# Altium PCB PCB.PcbDoc
Units mm, origin at the board's own origin, x right, y up, seen from the top; angles counter-clockwise.
Board outline 17.5 x 15 mm, 2 copper layers (Top Layer, Bottom Layer); 1 components, 2 nets, 7 pads, 0 vias.
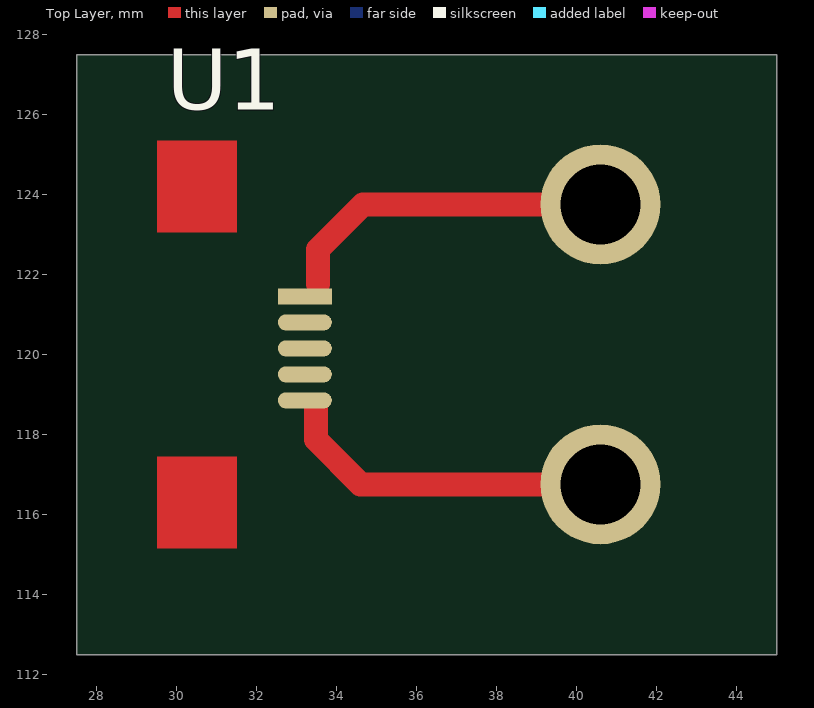
[diagram p0: Top Layer view]
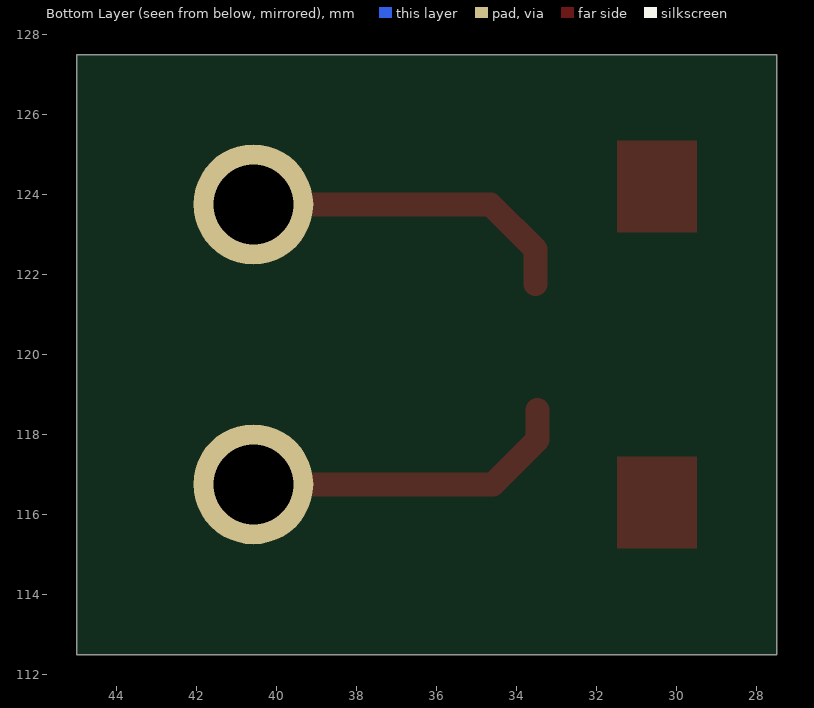
[diagram p1: Bottom Layer view, seen from below]

## Layer stack, top to bottom
Top Layer: signal copper 0.0356
Dielectric: dielectric 0.32, FR-4, Dk 4.8
Bottom Layer: signal copper 0.0356

## Board outline
27.5,127.5 45,127.5 45,112.5 27.5,112.5

## Design rules (kind name [scope] priority, off if disabled: settings)
Clearance Clearance_1 [IsRegion] p1: gap=1
Clearance [Not HasFootprint('LED')] p2: gap=0.6
PolygonConnect [All] p1: connectstyle=Relief reliefconductorwidth=0.254 reliefentries=4 polygonreliefangle="90 Angle"
RoutingVias [All] p1: holewidth=0.711 width=1.27 viastyle="Through Hole" minholewidth=0.711 minwidth=1.27 maxholewidth=0.711 maxwidth=1.27
SilkscreenOverComponentPads [All] p1: minsilkscreentomaskgap=0.254
SolderMaskExpansion SolderMaskExpansion_1 [HasFootprint('LED')] p1: expansion=0.15
SolderMaskExpansion [Not HasFootprint('LED')] p2: expansion=0.4
Width [All] p1: maxlimit=2 minlimit=0.6 preferedwidth=0.8
27 further rules are at their usual default settings.

## Components (designator, comment, footprint, x,y, rotation, side; value= is the part's Value field where it differs from the comment)
U1 "USB Soquete" USB 34,121.761 r270 top

## Footprints (in the part's own frame and the unit in brackets; to place one, negate y for a bottom-side part, rotate by r counter-clockwise, add the part's x,y. Pads: shape width x height; smd on the part's side, far side on the other; paste and mask are expansions set on the pad)
USB [mm]
  rect 0.4x1.35 smd: 1(0.3,-0.8)
  oval 0.4x1.35 smd: 2(0.95,-0.8) 3(1.6,-0.8) 4(2.25,-0.8) 5(2.9,-0.8)
  Top Layer region: -3.601,-4.5 -1.301,-4.5 -1.301,-2.5 -3.601,-2.5
  Top Layer region: 4.299,-4.5 6.599,-4.5 6.599,-2.5 4.299,-2.5

## Free pads (board coordinates)
  round 3 hole 2: 0(40.589,116.764) 1(40.589,123.761)

## Nets (pads, with @x,y where several pads share a name; then routed paths per layer and width w, separated by ;. In a path a pad name is that pad's centre, name@x,y a point inside that pad or via, vN(x,y) a via of type N, cw(c..) or ccw(c..) an arc to the next point about the centre after c; other vN are vias at no path point)
GND: pad.0 U1.5 | length 8.3
  Top Layer w0.6: 33.477,118.618 33.477,117.881 34.595,116.764 pad.0
VCC: pad.1 U1.1 | length 8.4
  Top Layer w0.6: 33.528,121.768 33.528,122.631 34.657,123.761 pad.1
pads on no net: U1.2 U1.3 U1.4